# EAGLE board Sensor Board@aabf283e37e146bd9c52980098e73883 (EAGLE 6.4)
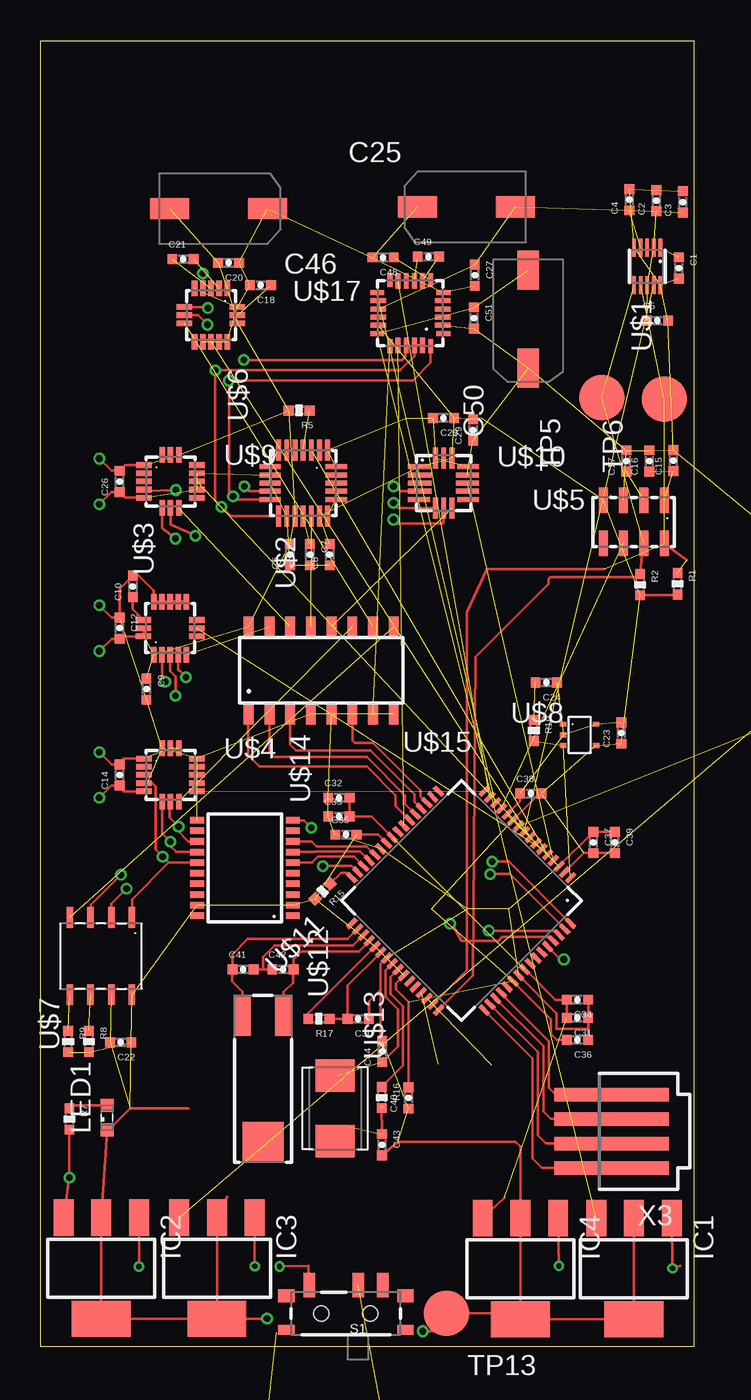
[diagram p0: board, top side]
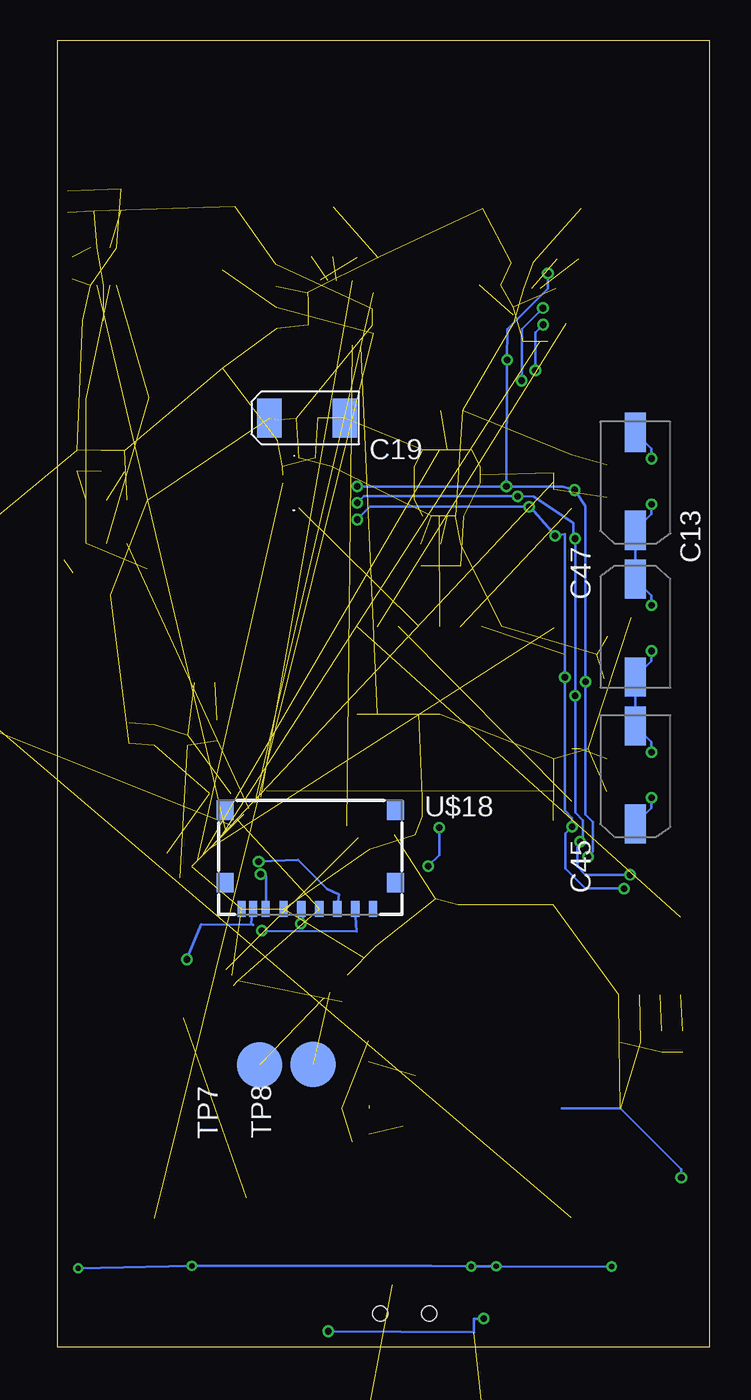
[diagram p1: board, bottom side, seen from below]

Size 40 x 80 mm. Coordinates in mm from the lower left corner, seen from the top.
Outline: 40,0 0,0 0,80 40,80 40,0
Copper layers (1*2*15*16): Top 0.035mm / dielectric 0.2mm / Route2 0.0175mm / dielectric 1.1mm / Route15 0.0175mm / dielectric 0.2mm / Bottom 0.035mm
Design rules "SeeedStudio_DRU_no_angle_20130527": minimum track width 6mil, minimum drill 12mil, track to track 6mil, track to pad 6mil, pad to pad 6mil, via to via 6mil, smd to smd 0mil, copper to edge 10mil, drill to drill 10mil, minimum pad ring 6mil, minimum via ring 6mil, stop-mask expansion 2mil, vias tented up to drill 25mil, thermal gap 10mil

## Footprints (pad centres in the part's own frame; a part is rotated, then mirrored left to right if it is on the bottom)
BATTCON_20MM_4LEGS = smd 1.778 x 2.54: 1 -11,1.55; 3 11,1.55; P$1 -11,-1.55; P$2 11,-1.55 | smd 13 x 8: 2 0,0
0402-CAP = smd 0.6 x 0.6: 1 -0.65,0; 2 0.65,0
4.3X7.3SMD = smd 2.4 x 1.3: P$1 -3,0; P$2 3,0
EIA6032 = smd 1.5 x 2.4: P$1 -2.3,0; P$2 2.3,0
SOT223 = smd 1.219 x 2.235: 1 -2.311,-3.099; 2 0,-3.099; 3 2.311,-3.099 | smd 3.6 x 2.2: 4 0,3.099
LED_SML0603 = smd 0.8 x 0.8: A 0.75,0; C -0.75,0
0402 = smd 0.6 x 0.6: 1 -0.65,0; 2 0.65,0
SWITCH-SPST-SMD-A = smd 0.7 x 1.5: 1 -2.25,-1.75; 2 -0.75,-1.75; 3 2.25,-1.75 | smd 1 x 0.6: GND1 -3.65,1; GND3 3.65,1 | smd 1 x 0.8: GND2 -3.65,-1.1; GND4 3.65,-1.1 | hole 0.9: -1.5,0; 1.5,0
TESTPAD(ROUND) = smd 2.794 x 2.794: P$1 0,0
DFN-10(2X2)_HS = smd 1.1 x 0.225: P$1 -1.15,0.8; P$2 -1.15,0.4; P$3 -1.15,0; P$4 -1.15,-0.4; P$5 -1.15,-0.8; P$6 1.15,-0.8; P$7 1.15,-0.4; P$8 1.15,0; P$9 1.15,0.4; P$10 1.15,0.8
QFN-24(4X4)_HS = smd 1.3 x 0.3: P$1 -2.025,1.5; P$2 -2.025,1; P$3 -2.025,0.5; P$4 -2.025,0; P$5 -2.025,-0.5; P$6 -2.025,-1; P$7 -2.025,-1.5; P$13 2.025,-1.5; P$14 2.025,-1; P$15 2.025,-0.5; P$16 2.025,0; P$17 2.025,0.5; P$18 2.025,1; P$19 2.025,1.5 | smd 0.3 x 1.3: P$8 -1,-2.025; P$9 -0.5,-2.025; P$10 0,-2.025; P$11 0.5,-2.025; P$12 1,-2.025; P$20 1,2.025; P$21 0.5,2.025; P$22 0,2.025; P$23 -0.5,2.025; P$24 -1,2.025
LGA-16(3X3)_HS = smd 0.95 x 0.34: P$1 -1.625,1; P$2 -1.625,0.5; P$3 -1.625,0; P$4 -1.625,-0.5; P$5 -1.625,-1; P$9 1.625,-1; P$10 1.625,-0.5; P$11 1.625,0; P$12 1.625,0.5; P$13 1.625,1 | smd 0.34 x 0.95: P$6 -0.5,-1.625; P$7 0,-1.625; P$8 0.5,-1.625; P$14 0.5,1.625; P$15 0,1.625; P$16 -0.5,1.625
LGA-8(5X3)_HS = smd 0.55 x 1.55: P$1 -1.875,-1.325; P$2 -0.625,-1.325; P$3 0.625,-1.325; P$4 1.875,-1.325; P$5 1.875,1.325; P$6 0.625,1.325; P$7 -0.625,1.325; P$8 -1.875,1.325
SOIC-8(5X6.2) = smd 1.27 x 0.41: P$1 -2.365,1.905; P$2 -2.365,0.635; P$3 -2.365,-0.635; P$4 -2.365,-1.905; P$5 2.365,-1.905; P$6 2.365,-0.635; P$7 2.365,0.635; P$8 2.365,1.905
SOT323-5L = smd 0.4 x 0.3: P$1 1,-0.65; P$2 1,0; P$3 1,0.65; P$4 -1,0.65; P$5 -1,-0.65
LGA-16(3X3.25)_HS = smd 1.32 x 0.3: P$1 -1.513,1; P$5 -1.513,-1; P$9 1.513,-1; P$13 1.513,1 | smd 1.425 x 0.3: P$2 -1.462,0.5; P$3 -1.462,0; P$4 -1.462,-0.5; P$10 1.462,-0.5; P$11 1.462,0; P$12 1.462,0.5 | smd 0.3 x 1.3: P$6 -0.5,-1.525; P$7 0,-1.525; P$8 0.5,-1.525; P$14 0.5,1.525; P$15 0,1.525; P$16 -0.5,1.525
S-PQFP-G64 = smd 0.75 x 0.27: P$1 -5.725,3.75; P$2 -5.725,3.25; P$3 -5.725,2.75; P$4 -5.725,2.25; P$5 -5.725,1.75; P$6 -5.725,1.25; P$7 -5.725,0.75; P$8 -5.725,0.25; P$9 -5.725,-0.25; P$10 -5.725,-0.75; P$11 -5.725,-1.25; P$12 -5.725,-1.75; P$13 -5.725,-2.25; P$14 -5.725,-2.75; P$15 -5.725,-3.25; P$16 -5.725,-3.75; P$33 5.725,-3.75; P$34 5.725,-3.25; P$35 5.725,-2.75; P$36 5.725,-2.25; P$37 5.725,-1.75; P$38 5.725,-1.25; P$39 5.725,-0.75; P$40 5.725,-0.25; P$41 5.725,0.25; P$42 5.725,0.75; P$43 5.725,1.25; P$44 5.725,1.75; P$45 5.725,2.25; P$46 5.725,2.75; P$47 5.725,3.25; P$48 5.725,3.75 | smd 0.27 x 0.75: P$17 -3.75,-5.725; P$18 -3.25,-5.725; P$19 -2.75,-5.725; P$20 -2.25,-5.725; P$21 -1.75,-5.725; P$22 -1.25,-5.725; P$23 -0.75,-5.725; P$24 -0.25,-5.725; P$25 0.25,-5.725; P$26 0.75,-5.725; P$27 1.25,-5.725; P$28 1.75,-5.725; P$29 2.25,-5.725; P$30 2.75,-5.725; P$31 3.25,-5.725; P$32 3.75,-5.725; P$49 3.75,5.725; P$50 3.25,5.725; P$51 2.75,5.725; P$52 2.25,5.725; P$53 1.75,5.725; P$54 1.25,5.725; P$55 0.75,5.725; P$56 0.25,5.725; P$57 -0.25,5.725; P$58 -0.75,5.725; P$59 -1.25,5.725; P$60 -1.75,5.725; P$61 -2.25,5.725; P$62 -2.75,5.725; P$63 -3.25,5.725; P$64 -3.75,5.725
CYLINDRICAL-(1.9DIAX6L) = smd 2.5 x 1: P$1 3.875,1.25; P$2 3.875,-1.25 | smd 2.5 x 2.5: P$3 -3.875,0
2-SMD = smd 2 x 2.4: P$1 -2,0; P$2 2,0
TSSOP-(PW)-20 = smd 0.4 x 0.85: P$1 -2.925,-2.925; P$2 -2.275,-2.925; P$3 -1.625,-2.925; P$4 -0.975,-2.925; P$5 -0.325,-2.925; P$6 0.325,-2.925; P$7 0.975,-2.925; P$8 1.625,-2.925; P$9 2.275,-2.925; P$10 2.925,-2.925; P$11 2.925,2.925; P$12 2.275,2.925; P$13 1.625,2.925; P$14 0.975,2.925; P$15 0.325,2.925; P$16 -0.325,2.925; P$17 -0.975,2.925; P$18 -1.625,2.925; P$19 -2.275,2.925; P$20 -2.925,2.925
SOIC-16 = smd 0.6 x 1.27: P$1 -4.445,-2.675; P$2 -3.175,-2.675; P$3 -1.905,-2.675; P$4 -0.635,-2.675; P$5 0.635,-2.675; P$6 1.905,-2.675; P$7 3.175,-2.675; P$8 4.445,-2.675; P$9 4.445,2.675; P$10 3.175,2.675; P$11 1.905,2.675; P$12 0.635,2.675; P$13 -0.635,2.675; P$14 -1.905,2.675; P$15 -3.175,2.675; P$16 -4.445,2.675
LCC-8(5X5)_HS = smd 1.87 x 0.735: P$1 -2.117,1.27; P$2 -2.117,0; P$3 -2.117,-1.27; P$5 2.117,-1.27; P$6 2.117,0; P$7 2.117,1.27 | smd 0.735 x 1.87: P$4 0,-2.117; P$8 0,2.117
LGA-24(4X4)_HS = smd 0.85 x 0.3: P$1 -2.025,1.25; P$6 -2.025,-1.25; P$13 2.025,-1.25; P$18 2.025,1.25 | smd 0.95 x 0.3: P$2 -1.975,0.75; P$3 -1.975,0.25; P$4 -1.975,-0.25; P$5 -1.975,-0.75; P$14 1.975,-0.75; P$15 1.975,-0.25; P$16 1.975,0.25; P$17 1.975,0.75 | smd 0.3 x 0.85: P$7 -1.25,-2.025; P$12 1.25,-2.025; P$19 1.25,2.025; P$24 -1.25,2.025 | smd 0.3 x 0.95: P$8 -0.75,-1.975; P$9 -0.25,-1.975; P$10 0.25,-1.975; P$11 0.75,-1.975; P$20 0.75,1.975; P$21 0.25,1.975; P$22 -0.25,1.975; P$23 -0.75,1.975
SD-105027-101 = smd 0.5 x 1: P$1 3.85,-6.66; P$2 2.75,-6.66; P$3 1.65,-6.66; P$4 0.55,-6.66; P$5 -0.55,-6.66; P$6 -1.65,-6.66; P$7 -2.75,-6.66; P$8 -3.51,-6.66; P$9 -4.21,-6.66 | smd 1.05 x 1.2: P$10 -5.225,-0.6; P$11 -5.225,-5.05; P$12 5.225,-5.05; P$13 5.225,-0.6
87438-04 = smd 7 x 0.85: 1 0,2.25; 2 0,0.75; 3 0,-0.75; 4 0,-2.25

## Placement (x,y rotation side)
BAT1  20mm coincell  [BATTCON_20MM_4LEGS]  12.55,-16.46 180 top  (outside the outline)
C1  100nF  [0402-CAP]  39.09,66.09 270 top
C2  1uF  [0402-CAP]  37.72,70.21 90 top
C3  100nF  [0402-CAP]  39.34,70.13 90 top
C4  100nF  [0402-CAP]  36.07,70.26 90 top
C5  100nF  [0402-CAP]  37.79,62.86 0 top
C6  1uF  [0402-CAP]  15.27,48.51 90 top
C7  100nF  [0402-CAP]  16.48,48.51 270 top
C8  1uF  [0402-CAP]  17.7,48.51 90 top
C9  100nF  [0402-CAP]  6.48,40.28 270 top
C10  10nF  [0402-CAP]  5.64,46.58 90 top
C12  10uF  [0402-CAP]  4.83,44.02 270 top
C13  100nF  [4.3X7.3SMD]  4.57,44.02 90 bottom
C14  100nF  [0402-CAP]  4.83,35.03 90 top
C15  100nF  [0402-CAP]  38.76,54.29 90 top
C16  10uF  [0402-CAP]  37.29,54.26 90 top
C17  100nF  [0402-CAP]  35.88,54.26 90 top
C18  4.7uF  [0402-CAP]  13.46,65.02 180 top
C19  1uF  [EIA6032]  24.69,56.9 0 bottom
C20  100nF  [0402-CAP]  11.51,66.4 180 top
C21  0.22uF  [0402-CAP]  8.71,66.62 0 top
C22  0.1uF  [0402-CAP]  4.9,18.64 180 top
C23  0.1uF  [0402-CAP]  35.57,37.59 90 top
C24  1uF  [0402-CAP]  30.97,40.68 180 top
C25  10uF  [4.3X7.3SMD]  26.09,69.82 180 top
C26  100nF  [0402-CAP]  4.83,53.01 90 top
C27  100nF  [0402-CAP]  26.59,65.63 270 top
C28  0.1uF  [0402-CAP]  24.69,56.9 180 top
C29  0.1uF  [0402-CAP]  26.49,56.16 90 top
C30  0.1uF  [0402-CAP]  19.45,20.08 180 top
C31  0.1uF  [0402-CAP]  32.89,20.14 180 top
C32  0.1uF  [0402-CAP]  18.26,33.63 0 top
C33  2.2uF  [0402-CAP]  18.26,32.49 0 top
C34  1.0uF  [0402-CAP]  32.89,21.26 180 top
C35  0.01uF  [0402-CAP]  18.69,31.37 0 top
C36  0.1uF  [0402-CAP]  32.89,18.8 180 top
C37  0.01uF  [0402-CAP]  33.86,30.89 270 top
C38  0.1uF  [0402-CAP]  30.02,33.88 0 top
C39  0.01uF  [0402-CAP]  35.18,30.89 270 top
C40  1.0uF  [0402-CAP]  22.53,15.24 90 top
C41  24pF  [0402-CAP]  12.4,23.11 0 top
C42  24pF  [0402-CAP]  14.83,23.11 0 top
C43  10pF  [0402-CAP]  20.9,12.37 270 top
C44  10pF  [0402-CAP]  20.93,18.08 90 top
C45  10uF  [4.3X7.3SMD]  4.57,35.03 270 bottom
C46  10uF  [4.3X7.3SMD]  10.9,69.72 0 top
C47  10uF  [4.3X7.3SMD]  4.57,53.01 270 bottom
C48  4.7uF  [0402-CAP]  20.98,66.73 180 top
C49  0.22uF  [0402-CAP]  23.75,66.78 0 top
C50  10uF  [4.3X7.3SMD]  29.87,62.94 270 top
C51  100nF  [0402-CAP]  26.54,63.02 270 top
C52  0.1uF  [0402-CAP]  52.22,44.48 270 top  (outside the outline)
C53  4.7uF  [4.3X7.3SMD]  59.05,47.65 0 top  (outside the outline)
IC1  LT1963EST-1.5  [SOT223]  36.35,4.78 180 top
IC2  LT1963EST-1.5  [SOT223]  3.71,4.8 180 top
IC3  LT1963EST-1.5  [SOT223]  10.79,4.8 180 top
IC4  LT1963EST-1.5  [SOT223]  29.39,4.78 180 top
LED1  Green  [LED_SML0603]  4.06,14.05 90 top
R1  10k  [0402]  39.01,46.74 270 top
R2  10k  [0402]  36.73,46.69 270 top
R5  4.7k  [0402]  15.82,57.35 180 top
R7  10k  [0402]  1.75,13.94 270 top
R8  10k  [0402]  2.95,18.69 270 top
R9  10k  [0402]  1.68,18.69 270 top
R10  200  [0402]  30.21,37.75 270 top
R15  1M  [0402]  17.27,27.9 225 top
R16  0  [0402]  20.89,15.27 270 top
R17  10k  [0402]  17.04,20.09 180 top
S1  Power  [SWITCH-SPST-SMD-A]  18.69,2.03 180 top
TP5  TESTPAD(ROUND)  [TESTPAD(ROUND)]  34.38,58.14 270 top
TP6  TESTPAD(ROUND)  [TESTPAD(ROUND)]  38.21,58.06 270 top
TP7  TESTPAD(ROUND)  [TESTPAD(ROUND)]  27.61,17.25 270 bottom
TP8  TESTPAD(ROUND)  [TESTPAD(ROUND)]  24.33,17.29 270 bottom
TP13  TESTPAD(ROUND)  [TESTPAD(ROUND)]  24.87,2.06 0 top
U$1  MAG3110_HS  [DFN-10(2X2)_HS]  37.16,66.18 270 top
U$2  FXAS21000_HS  [QFN-24(4X4)_HS]  16.08,52.91 270 top
U$3  L3GD20H_HS  [LGA-16(3X3)_HS]  7.92,44.02 90 top
U$4  LPS331AP_HS  [LGA-16(3X3)_HS]  7.95,35.03 0 top
U$5  MPL3115A2_HS  [LGA-8(5X3)_HS]  36.33,50.53 180 top
U$6  LSM303D_HS  [LGA-16(3X3)_HS]  10.43,63.2 270 top
U$7  ADT7310  [SOIC-8(5X6.2)]  3.69,23.93 270 top
U$8  STLM20  [SOT323-5L]  33.02,37.48 180 top
U$9  LIS3DH  [LGA-16(3X3)_HS]  7.95,53.01 0 top
U$10  ADXL362  [LGA-16(3X3.25)_HS]  24.69,52.91 0 top
U$11  TM4C1233H6PM  [S-PQFP-G64]  25.77,27.33 225 top
U$12  32.768 kHz  [CYLINDRICAL-(1.9DIAX6L)]  13.61,16.41 90 top
U$13  16.000 MHz  [2-SMD]  18.04,14.6 90 top
U$14  TXB0108  [TSSOP-(PW)-20]  12.52,29.33 90 top
U$15  CD74HC138  [SOIC-16]  17.19,41.43 0 top
U$16  ADXL78  [LCC-8(5X5)_HS]  58.88,41.61 90 top  (outside the outline)
U$17  LSM9DS0_HS  [LGA-24(4X4)_HS]  22.64,63.32 180 top
U$18  SD-105027-101  [SD-105027-101]  24.49,33.48 0 bottom
X3  87438-04  [87438-04]  34.98,13.19 180 top

## Library data of the parts
BAT1 = SparkFun-Electromechanical; PROD_ID: BATT-10373
C1-C10 C12-C18 C20-C53 R1 R2 R5 R7-R10 R15-R17 TP5-TP8 TP13 = Kas-Passives
C19 = SparkFun-Passives
IC1-IC4 = linear-technology; MPN: LT1963EST-1.5; OC_FARNELL: 1663528; OC_NEWARK: 57M7534
LED1 = eagle-ltspice; SPICEMODEL: NONE; SPICEPREFIX: D; SPICETYPE: diode
S1 = SparkFun-Electromechanical
U$1-U$10 U$16 U$17 = Kas-Sensors
U$11 = Kas-Microcontroller
U$12 U$13 = Kas-Crystal
U$14 U$15 = Kas-Buffers & Level Shifters
U$18 = Kas-Connectors
X3 = con-molex; OC_FARNELL: unknown; OC_NEWARK: unknown

## Nets
1.2V: C31.2 C32.2 C33.2 C34.2 IC4.3 U$11.P$25 U$11.P$56
3.0V: C50.P$1 C51.1 IC1.3 U$17.P$18
3.3V: C2.1 C3.1 C5.1 C6.2 C8.2 C9.1 C12.2 C13.P$1 C14.2 C19.P$1 C20.2 C22.1 C23.1 C25.P$1 C26.2 C27.1 C28.1 C29.2 C35.2 C36.2 C37.2 C38.2 C39.2 C40.2 C45.P$1 C46.P$1 C47.P$1 IC2.3 R1.2 R2.2 R5.2 R7.2 R8.2 R9.2 R15.2 R17.2 U$1.P$2 U$1.P$8 U$2.P$15 U$2.P$18 U$3.P$1 U$3.P$15 U$3.P$16 U$4.P$1 U$4.P$14 U$4.P$15 U$5.P$4 U$6.P$1 U$6.P$14 U$7.P$8 U$8.P$4 U$9.P$1 U$9.P$14 U$10.P$1 U$10.P$14 U$11.P$2 U$11.P$11 U$11.P$26 U$11.P$37 U$11.P$42 U$11.P$54 U$14.P$2 U$14.P$19 U$15.P$16 U$17.P$15 U$17.P$16 U$17.P$17 U$18.P$4
5.0V: C52.1 C53.P$1 IC3.3 U$16.P$7 U$16.P$8
ADXL78-ST: U$16.P$4
ANALOG-OUT-ADXL78: U$11.P$10 U$16.P$6
ANALOG-OUT-STLM20: R10.2 U$8.P$3 U$11.P$1
CS-ADT7310: U$7.P$4 U$15.P$9
CS-ADXL362: U$10.P$8 U$15.P$12
CS-ENABLE: U$11.P$19 U$15.P$6
CS-FXAS: U$2.P$17 U$15.P$13
CS-LIS3DH: U$9.P$8 U$15.P$14
CS-LPS331: U$4.P$8 U$15.P$11
CS-LSGD: U$3.P$5 U$15.P$15
CS-LSM9D30-G: U$15.P$7 U$17.P$19
CS-LSM9DS0-XM: U$11.P$23 U$17.P$20
CS-LSM303: U$6.P$8 U$15.P$10
CT-ADT7310: R8.1 U$7.P$6
DEN-L3GD: U$3.P$8
GND: BAT1.2 C1.2 C2.2 C3.2 C4.2 C5.2 C6.1 C7.2 C8.1 C9.2 C10.2 C12.1 C13.P$2 C14.1 C15.2 C16.2 C17.2 C18.2 C19.P$2 C20.1 C22.2 C23.2 C24.1 C25.P$2 C26.1 C27.2 C28.2 C29.1 C30.1 C31.1 C32.1 C33.1 C34.1 C35.1 C36.1 C37.1 C38.1 C39.1 C40.1 C43.2 C44.2 C45.P$2 C46.P$2 C47.P$2 C48.2 C50.P$2 C51.2 C52.2 C53.P$2 IC1.2 IC1.4 IC2.2 IC2.4 IC3.2 IC3.4 IC4.2 IC4.4 LED1.C TP13.P$1 U$1.P$5 U$1.P$10 U$2.P$1 U$2.P$5 U$2.P$6 U$2.P$7 U$2.P$8 U$2.P$9 U$2.P$10 U$2.P$14 U$2.P$19 U$2.P$20 U$2.P$21 U$2.P$22 U$2.P$23 U$2.P$24 U$3.P$9 U$3.P$10 U$3.P$11 U$3.P$12 U$3.P$13 U$4.P$5 U$4.P$10 U$4.P$11 U$4.P$12 U$4.P$13 U$4.P$16 U$5.P$3 U$6.P$5 U$6.P$10 U$6.P$12 U$6.P$13 U$6.P$16 U$7.P$7 U$8.P$2 U$8.P$5 U$9.P$5 U$9.P$10 U$9.P$12 U$10.P$12 U$10.P$13 U$10.P$16 U$11.P$3 U$11.P$12 U$11.P$27 U$11.P$39 U$11.P$55 U$14.P$11 U$15.P$4 U$15.P$5 U$15.P$8 U$16.P$3 U$17.P$2 U$17.P$3 U$17.P$4 U$17.P$5 U$17.P$6 U$18.P$6 U$18.P$9
INT1-ADXL362: U$10.P$11 U$11.P$4
INT1-FXAS: U$2.P$3 U$11.P$5
INT1-L3GD: U$3.P$7 U$11.P$6
INT1-LIS3DH: U$9.P$11 U$11.P$7
INT1-LSM303: U$6.P$11 U$11.P$8
INT1-MAG3110: U$1.P$9 U$11.P$9
INT1-MPL311: U$5.P$6 U$11.P$13
INT2-LPS331: U$4.P$9 U$11.P$16
INT-ADT7310: R9.1 U$7.P$5
LSM9D-DEN-G: U$17.P$10
LSM9D-DRGY-G: U$17.P$12
LSM9D-INT1-XM: U$11.P$14 U$17.P$13
LSM9D-INT-G: U$11.P$15 U$17.P$11
MISO-A: U$11.P$28 U$14.P$8
MISO-B: U$2.P$13 U$3.P$4 U$4.P$7 U$6.P$7 U$7.P$2 U$9.P$7 U$10.P$7 U$14.P$13 U$17.P$22 U$17.P$23
MOSI-A: U$11.P$29 U$14.P$7
MOSI-B: U$2.P$12 U$3.P$3 U$4.P$6 U$6.P$6 U$7.P$3 U$9.P$6 U$10.P$6 U$14.P$14 U$17.P$24
N$1: C1.1 U$1.P$1
N$2: C7.1 U$2.P$16
N$3: C4.1 U$1.P$4
N$4: C10.1 U$3.P$14
N$5: C17.1 U$5.P$2
N$6: C18.1 U$6.P$15
N$7: C21.2 U$6.P$2
N$8: C48.1 U$17.P$7
N$9: C24.2 R10.1
N$10: C30.2 R17.1 U$11.P$38
N$11: C42.2 U$11.P$36 U$12.P$2
N$12: C41.1 U$11.P$34 U$12.P$1
N$13: C41.2 C42.1 U$11.P$35
N$14: C43.1 R16.2 U$13.P$1
N$15: C21.1 U$6.P$3
N$16: C44.1 U$11.P$40 U$13.P$2
N$17: R16.1 U$11.P$41
N$18: R15.1 U$11.P$32
N$19: BAT1.1 S1.2
N$21: C49.2 U$17.P$8
N$22: C49.1 U$17.P$9
N$23: IC1.1 IC2.1 IC3.1 IC4.1 S1.3
N$25: C15.1 C16.1 U$5.P$1
N$27: LED1.A R7.1
RST_B: R5.1 U$2.P$4
SCL-0: R1.1 TP6.P$1 U$1.P$7 U$5.P$8 U$11.P$47
SCLK-A: U$11.P$30 U$14.P$6
SCLK-B: U$2.P$11 U$3.P$2 U$4.P$4 U$6.P$4 U$7.P$1 U$9.P$4 U$10.P$4 U$14.P$15 U$17.P$21
SD-CARD-INSERT: U$11.P$60 U$18.P$8
SD-CS: U$11.P$62 U$18.P$2
SD-MISO: U$11.P$63 U$18.P$7
SD-MOSI: U$11.P$64 U$18.P$3
SD-SCLK: U$11.P$61 U$18.P$5
SDA-0: R2.1 TP5.P$1 U$1.P$6 U$5.P$7 U$11.P$48
SPI-ADDR0: U$11.P$22 U$15.P$1
SPI-ADDR1: U$11.P$21 U$15.P$2
SPI-ADDR2: U$11.P$20 U$15.P$3
SPI-ENABLE: U$11.P$31 U$14.P$10
SWCLK: U$11.P$52 X3.4
SWDIO: U$11.P$51 X3.3
SWO: U$11.P$49 X3.1
TDI: U$11.P$50 X3.2
U1RX: TP8.P$1 U$11.P$45
U1TX: TP7.P$1 U$11.P$46

## Tracks (layer width: path | path; a pad name or v marks a point on that pad's centre or on a via)
1.2V  (2 unrouted)
  Top 0.152: IC4.3 28.4,9.12 | C32.2 C33.2 20.26,32.49 U$11.P$25 | C31.2 32.24,20.73 | 32.24,20.73 C34.2 31.55,21.26 29.79,23.01 29.73,23.01 U$11.P$56 29.64,23.07 29.66,23.07 | 32.22,20.7 32.24,20.73
3.0V  (3 unrouted)
3.3V  (via drill 0.41)  (51 unrouted)
  Top 0.152: IC2.3 v1.75,10.36 R7.2 | C35.2 20.67,31.37 U$11.P$26 | R2.2 38.96,46.03 R1.2 | U$11.P$37 | 29.18,22.15 31.27,20.06 31.27,19.15 31.62,18.8 C36.2 | C38.2 30.55,33.88 U$11.P$11 | C40.2 22.53,21.13 21.77,21.89 21.77,22.27 U$11.P$42 | R17.2 16.39,20.23 16.38,20.24 16.38,20.42 U$11.P$37 | U$11.P$2 33.27,30.24 C37.2 C39.2 | U$4.P$1 5.07,36.03 C14.2 4.33,35.68 v3.58,36.42 | U$3.P$16 | v3.58,54.41 4.33,53.66 C26.2 5.18,54.01 U$9.P$1 | U$3.P$15 U$3.P$16 | v3.58,42.62 4.33,43.37 C12.2 4.98,43.52 U$3.P$16
  Bottom 0.152: 9.07,14.61 5.49,14.61 1.75,10.87 v1.75,10.36 | C47.P$1 3.58,55.02 v3.58,54.41 | v3.58,36.42 3.58,37.04 C45.P$1 C13.P$1 3.58,42.01 v3.58,42.62
5.0V  (4 unrouted)
ANALOG-OUT-ADXL78  (1 unrouted)
ANALOG-OUT-STLM20  (2 unrouted)
CS-ADT7310  (1 unrouted)
CS-ADXL362  (1 unrouted)
CS-ENABLE
  Top 0.152: U$15.P$6 19.09,37.15 19.25,36.98 20.34,36.98 23.27,34.06 23.27,33.72 U$11.P$19
CS-FXAS  (1 unrouted)
CS-LIS3DH  (1 unrouted)
CS-LPS331  (1 unrouted)
CS-LSGD  (1 unrouted)
CS-LSM9D30-G  (1 unrouted)
CS-LSM9DS0-XM  (1 unrouted)
CS-LSM303  (1 unrouted)
CT-ADT7310  (1 unrouted)
GND  (via drill 0.41)  (87 unrouted)
  Top 0.152: IC1.2 IC1.4 IC4.4 | IC3.4 IC3.2 11.43,9.2 | 9.07,14.61 5.49,14.61 4.06,13.18 | IC4.4 29.64,2.03 TP13.P$1 | IC4.2 29.41,8.11 | IC4.4 IC4.2 | 24.48,1.77 TP13.P$1 | v13.87,1.72 IC3.4 | v23.39,0.95 24.26,0.94 TP13.P$1 | U$3.P$9 U$3.P$10 U$3.P$11 U$3.P$12 U$3.P$13 6.91,45.66 6.91,46.33 6,47.23 C10.2 4.83,46.42 C12.1 4.33,44.67 v3.58,45.41 | 4.06,13.18 IC2.2 IC2.4 IC3.4 | LED1.C 3.92,13.04 4.06,13.18 | U$11.P$3 C37.1 C39.1 | U$11.P$55 29.29,22.73 31.6,20.42 31.6,19.48 33.54,19.48 | C34.1 C31.1 33.54,19.48 | 28.68,32.72 U$11.P$12 29.37,33.41 C38.1 | IC4.2 29.39,12.27 29.1,12.56 21.89,12.56 C43.2 | C36.1 33.54,19.48 | C44.2 20.8,18.86 20.8,21.84 | 20.8,21.84 20.8,23.44 21.17,23.81 U$11.P$39 | C30.1 20.1,21.14 20.8,21.84 | U$4.P$5 5.07,34.03 C14.1 4.33,34.38 v3.58,33.63 | v3.58,51.61 4.33,52.36 C26.1 5.18,52.01 U$9.P$5
  Bottom 0.152: v13.87,1.72 14.46,1.72 14.46,0.9 v23.39,0.95 | v3.58,51.61 3.58,51 C47.P$2 C13.P$2 3.58,46.03 v3.58,45.41 | C45.P$2 3.58,33.02 v3.58,33.63
INT1-ADXL362  (1 unrouted)
INT1-FXAS  (1 unrouted)
INT1-L3GD  (1 unrouted)
INT1-LIS3DH  (1 unrouted)
INT1-LSM303  (1 unrouted)
INT1-MAG3110  (1 unrouted)
INT1-MPL311  (1 unrouted)
INT2-LPS331  (1 unrouted)
INT-ADT7310  (1 unrouted)
LSM9D-INT1-XM  (1 unrouted)
LSM9D-INT-G  (1 unrouted)
MISO-A
  Top 0.152: U$11.P$28 19.97,30.66 16.89,30.66 16.59,30.95 U$14.P$8
MISO-B  (via drill 0.41)
  Top 0.152: U$17.P$23 U$17.P$22 22.89,60.68 22.02,59.82 v10.69,59.82 10.69,51.84 v11.07,51.46 11.65,50.88 U$2.P$13 | U$9.P$7 7.94,50.38 v9.47,49.68 | U$10.P$7 24.69,50.49 24.61,50.42 21.87,50.42 v21.61,50.67 | v10.21,62.61 9.63,63.2 U$6.P$7 | U$4.P$7 7.95,33.16 8.01,33.1 | 8.01,33.1 8.01,33.45 | U$3.P$4 8.43,41.46 8.43,41.45 8.56,41.35 v8.89,41.02 | 8.01,33.1 7.92,33.1 7.9,33.07 7.9,32.41 v8.45,31.86 8.45,31.56 9.04,30.96 9.04,30.95 U$14.P$13 | U$7.P$2 4.32,27.13 v5.26,28.07
  Bottom 0.152: v10.69,59.82 10.69,62.13 v10.21,62.61 | v21.61,50.67 20.83,51.46 v11.07,51.46 11,51.44 v9.47,49.68 8.89,49.8 v8.89,41.02 8.89,32.84 8.45,32.4 v8.45,31.86 8.87,31.45 8.87,29.29 7.64,28.07 v5.26,28.07
MOSI-A
  Top 0.152: U$11.P$29 19.56,30.35 16.87,30.35 16.82,30.3 U$14.P$7
MOSI-B  (via drill 0.41)
  Top 0.152: U$9.P$6 7.44,51.28 7.44,50.14 v8.26,49.51 | 24.23,50.94 U$10.P$6 21.92,51.38 v21.61,51.69 | v10.24,63.63 10.17,63.7 U$6.P$6 | U$2.P$12 11.97,51.91 v11.79,52.09 11.53,52.35 v11.53,59.18 22.79,59.18 23.89,60.28 U$17.P$24 | U$3.P$3 7.92,41.39 8.27,41.05 8.27,39.91 v8.26,39.88 | U$4.P$6 7.45,31.44 v7.95,30.94 7.95,30.66 8.28,30.33 8.28,30.3 U$14.P$14 | U$7.P$3 3.05,27.05 v4.9,28.91
  Bottom 0.152: v8.26,49.51 8.36,49.51 8.36,50.47 10.79,52.07 v11.79,52.09 21.21,52.09 v21.61,51.69 | v11.53,59.18 11.53,62.33 v10.24,63.63 | 8.26,49.76 v8.26,49.51 | v8.26,49.51 v8.26,39.88 8.26,32.72 7.77,32.23 7.77,31.11 v7.95,30.94 8.13,30.76 8.13,29.41 7.62,28.91 v4.9,28.91
N$1  (1 unrouted)
N$2  (1 unrouted)
N$3  (1 unrouted)
N$4
  Top 0.152: C10.1 5.64,45.18 U$3.P$14
N$5  (1 unrouted)
N$6  (1 unrouted)
N$7  (1 unrouted)
N$8  (1 unrouted)
N$9  (1 unrouted)
N$10
  Top 0.152: U$11.P$38 18.8,22.14 C30.2 18.8,20.09 R17.1
N$11
  Top 0.152: U$12.P$2 14.86,21.72 15.44,22.3 15.44,23.07 C42.2 15.48,23.74 15.98,24.23 19.48,24.23 U$11.P$36
N$12
  Top 0.152: U$11.P$34 18.81,24.97 12.68,24.97 11.74,24.04 C41.1 11.73,23.1 11.73,22.38 12.36,21.75 U$12.P$1
N$13
  Top 0.152: C41.2 13.61,23.11 | 13.61,23.11 C42.1 | U$11.P$35 19.13,24.59 14.33,24.59 13.61,23.88 13.61,23.11
N$14  (2 unrouted)
  Top 0.152: U$13.P$1 18.82,13.49 | 20.89,14.78 C43.1
N$15  (1 unrouted)
N$16  (1 unrouted)
  Top 0.152: C44.1 21.89,18.4 21.89,20.68 21.13,21.44 21.13,23.04 21.54,23.45 U$11.P$40
N$17
  Top 0.152: R16.1 22.2,17.22 22.2,20.85 21.44,21.61 21.44,22.66 21.89,23.11 U$11.P$41
N$18
  Top 0.152: U$11.P$32 18.76,29.03 18.39,29.03 R15.1
N$19  (1 unrouted)
N$21  (1 unrouted)
N$22  (1 unrouted)
N$23  (via drill 0.33 pad 0.15)
  Top 0.152: 16.31,3.79 S1.3 16.41,3.78 16.41,4.97 v14.63,4.92 | 39.19,4.95 v38.71,4.8 IC1.1 | IC2.1 v6.02,4.9 | IC3.1 v13.11,4.93 | IC4.1 v31.75,4.95
  Bottom 0.152: v6.02,4.9 v13.11,4.93 v14.63,4.92 17.09,4.97 v31.75,4.95 v38.71,4.8
N$25  (2 unrouted)
N$27
  Top 0.152: LED1.A 1.75,14.8 R7.1
RST_B  (1 unrouted)
SCL-0  (4 unrouted)
  Top 0.152: 39.57,48.2 U$5.P$8 | U$11.P$47 26.11,23.08 26.11,45.01 27.33,47.65 34.49,47.65
SCLK-A
  Top 0.152: U$11.P$30 19.19,30.02 16.99,30.02 16.62,29.65 U$14.P$6
SCLK-B  (via drill 0.41)
  Top 0.152: U$9.P$4 6.34,52.43 v8.28,52.48 | U$10.P$4 22.06,52.42 v21.61,52.7 | 9.91,64.84 U$6.P$4 v9.93,65.76 | v12.47,52.7 12.77,52.41 U$2.P$11 | v12.44,60.45 22.12,60.45 22.35,60.68 22.35,61.31 U$17.P$21 22.38,61.33 | U$3.P$2 7.42,40.91 v7.62,40.74 | 7.84,29.65 v7.47,30.02 7.04,30.45 7.04,34.31 6.83,34.53 U$4.P$4 | U$7.P$1 5.59,27.41 7.84,29.65 | U$14.P$15 7.84,29.65
  Bottom 0.152: v12.47,52.7 9.04,52.68 v8.28,52.48 7.62,51.49 v7.62,40.74 7.62,32.61 7.16,32.16 7.16,30.33 v7.47,30.02 | v12.47,52.7 v21.61,52.7 | v12.47,52.7 v12.44,60.45 | v12.44,60.45 12.42,62.33 12.41,62.33 U$6.P$4 9.93,65.4 v9.93,65.76 | v12.44,60.45 12.43,59.64 12.43,59.77
SD-CARD-INSERT  (via drill 0.41)
  Top 0.152: U$11.P$60 31.85,23.72 v32.05,23.72
  Bottom 0.152: v32.05,23.72 31.17,25.86 27.99,25.83 28.09,25.93 28.12,25.97 U$18.P$8
SD-CS  (via drill 0.41)
  Top 0.152: U$11.P$62 31.72,25.23 31.47,25.48 v27.46,25.48
  Bottom 0.152: v27.46,25.48 21.65,25.45 U$18.P$2
SD-MISO  (via drill 0.41)
  Top 0.152: U$11.P$63 28.74,28.96 v27.53,28.96
  Bottom 0.152: v27.53,28.96 27.41,29.08 27.2,28.78 27.2,27.62 U$18.P$7
SD-MOSI  (via drill 0.41)
  Top 0.152: U$11.P$64 28.68,29.72 v27.66,29.72
  Bottom 0.152: v27.66,29.72 25.25,29.82 23.47,28.04 22.73,27.7 U$18.P$3
SD-SCLK  (via drill 0.41)
  Top 0.152: U$11.P$61 31.18,25.09 28.27,25.09 28.04,24.87 25.78,24.87 25.3,25.76 v25.07,25.91
  Bottom 0.152: v25.07,25.91 24.91,25.99 U$18.P$5
SDA-0  (2 unrouted)
  Top 0.152: U$5.P$7 36.83,48.52 R2.1 36.54,47.14 31.24,47.14 31.09,46.99 31.09,46.71 26.64,42.27 26.47,22.73 24.98,21.24 U$11.P$48
SPI-ADDR0
  Top 0.152: 12.68,38.51 12.74,38.57 U$15.P$1 12.7,38.72 12.7,36.25 13.41,35.53 19.99,35.53 21.74,33.78 21.74,33.12 U$11.P$22
SPI-ADDR1
  Top 0.152: U$15.P$2 14.01,36.43 14.33,36.12 19.99,36.12 22.33,33.78 22.33,33.25 U$11.P$21
SPI-ADDR2
  Top 0.152: U$15.P$3 15.28,36.89 15.65,36.52 20.22,36.52 22.91,33.83 22.91,33.37 U$11.P$20
SPI-ENABLE  (via drill 0.41)
  Top 0.152: v17.27,29.44 19.04,29.44 U$11.P$31 | v16.59,31.79 16.12,32.25 U$14.P$10
  Bottom 0.152: v16.59,31.79 16.59,30.12 v17.27,29.44
SWCLK
  Top 0.152: U$11.P$52 28.45,21.47 28.45,21.41 31.14,18.72 31.14,15.85 31.55,15.45 X3.4
SWDIO
  Top 0.152: U$11.P$51 30.79,18.42 30.79,14.43 31.27,13.95 X3.3
SWO
  Top 0.152: U$11.P$49 30.12,17.67 30.12,11.53 30.71,10.95 X3.1
TDI
  Top 0.152: U$11.P$50 30.45,18.05 30.45,12.95 30.96,12.45 X3.2
U1RX  (1 unrouted)
U1TX  (1 unrouted)